# Altium PCB Environmental Shield.PcbDoc
Units mm, origin at the board's own origin, x right, y up, seen from the top; angles counter-clockwise.
Board outline 53.34 x 50.8 mm, 2 copper layers (Top Layer, Bottom Layer), stack 1.621 mm thick; 28 components, 35 nets, 119 pads, 19 vias.
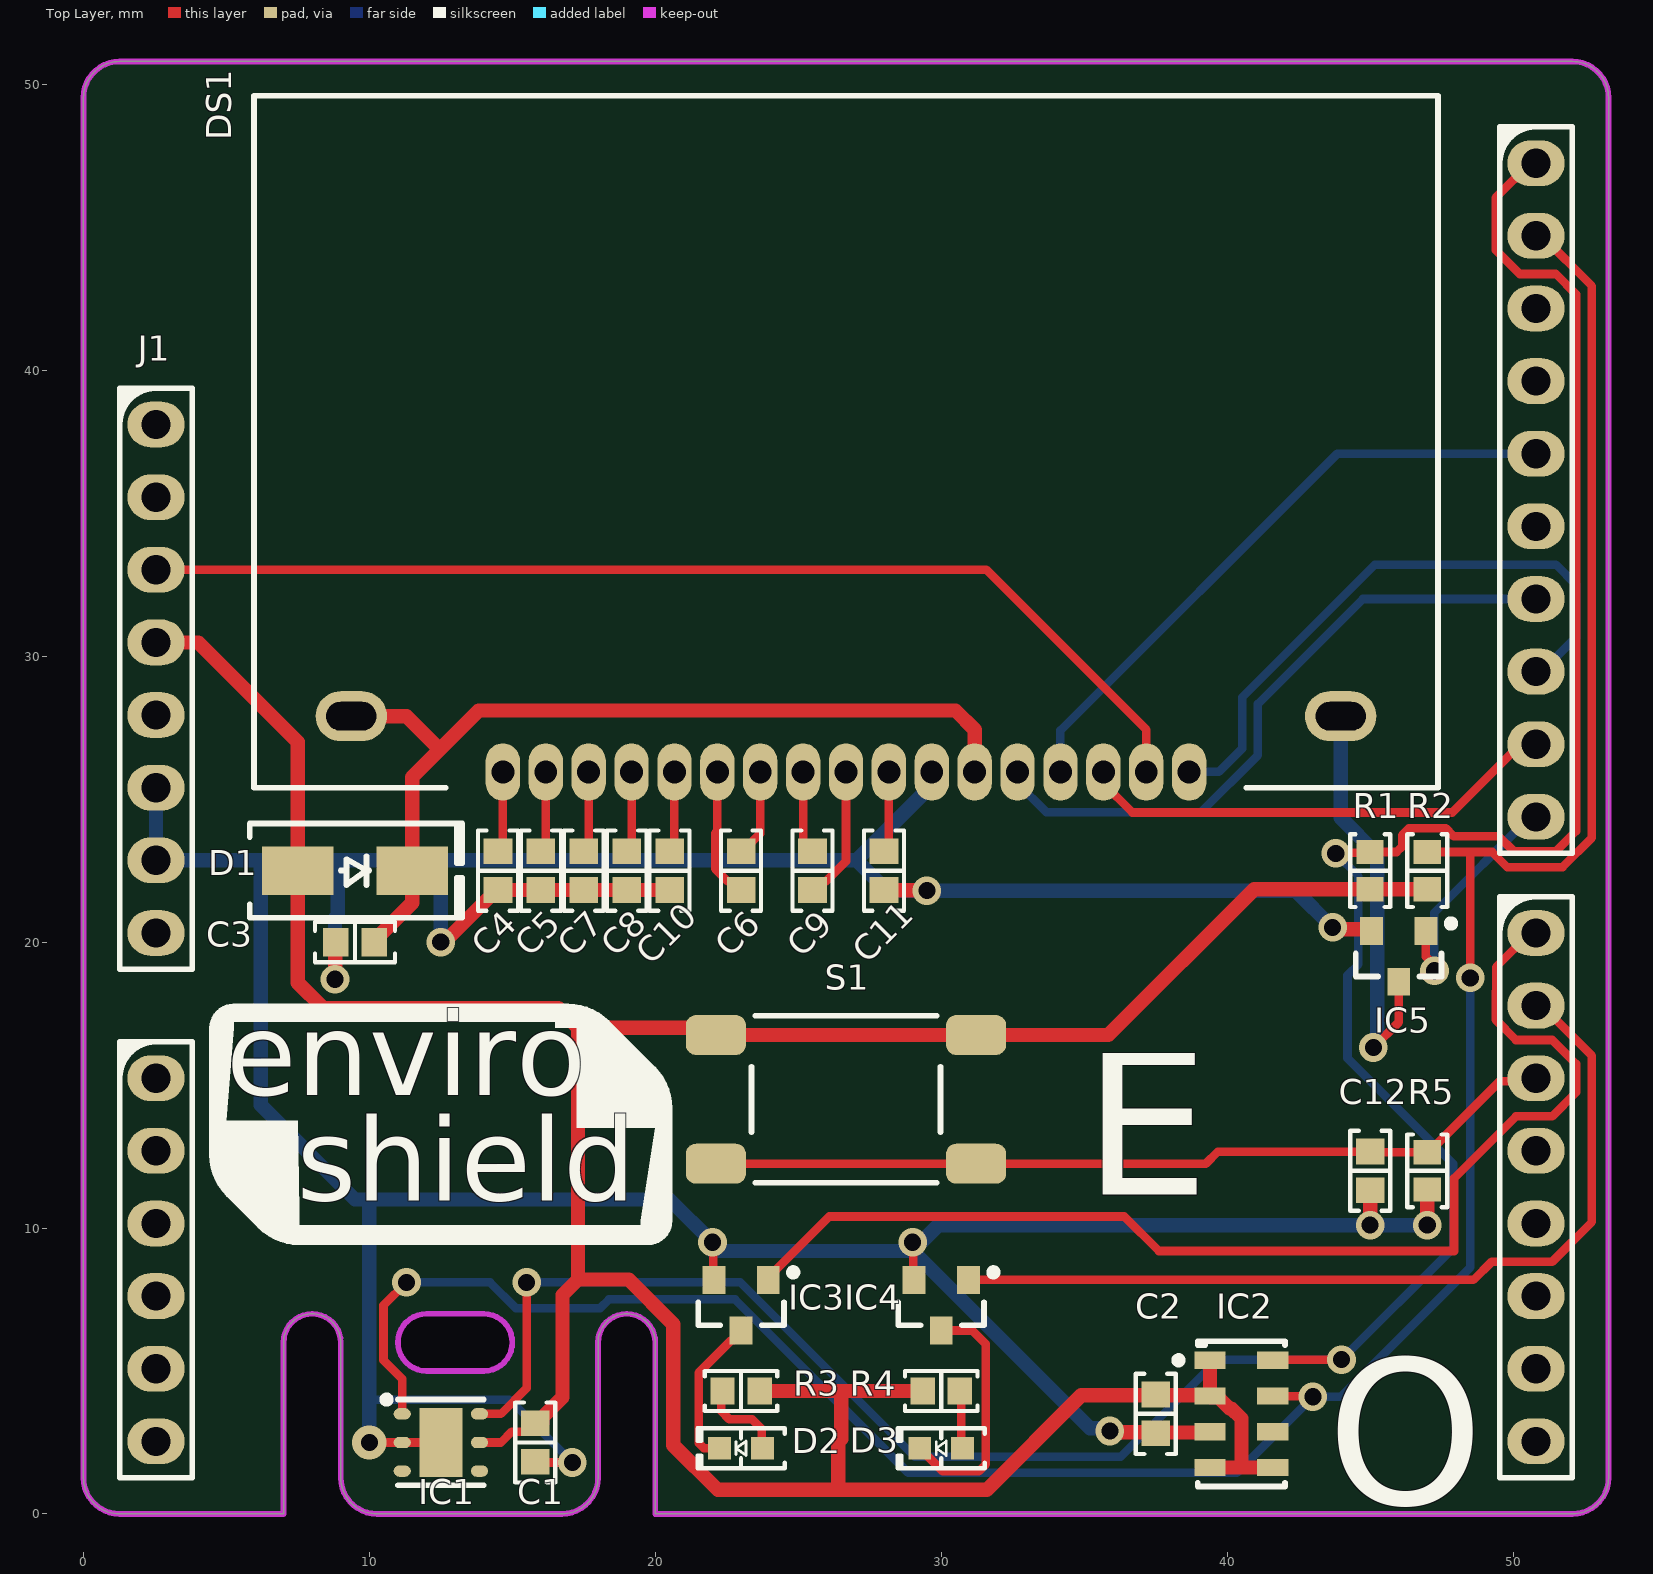
[diagram p0: Top Layer view]
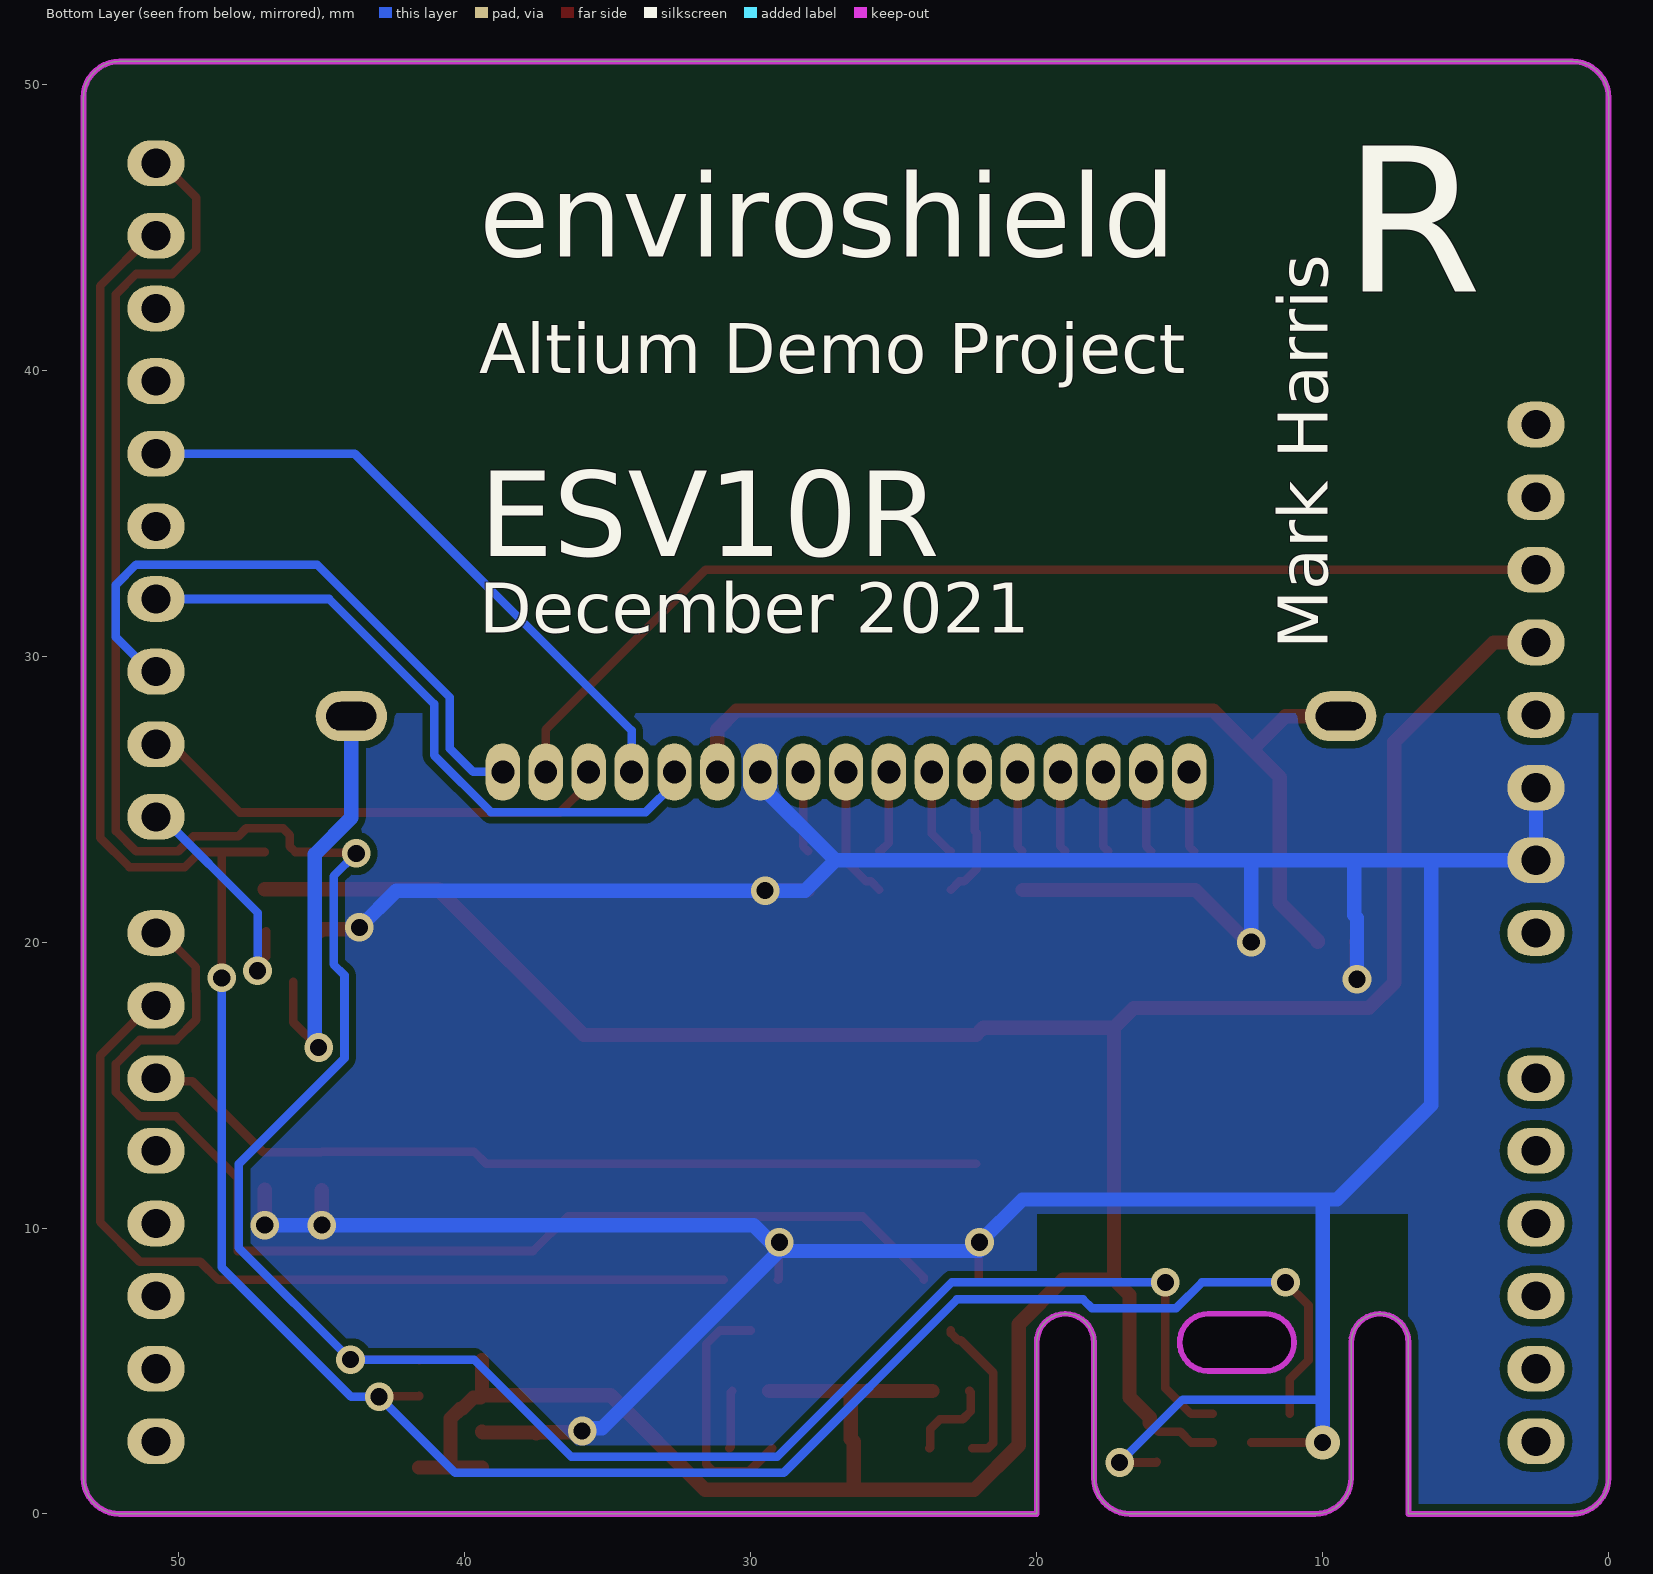
[diagram p1: Bottom Layer view, seen from below]

## Layer stack, top to bottom
Top Solder: solder mask 0.0102, Solder Resist, Dk 3.5
Top Layer: signal copper 0.0356
Dielectric 1: dielectric 1.55, FR-4, Dk 4.8
Bottom Layer: signal copper 0.0356
Bottom Solder: solder mask 0.0102, Solder Resist, Dk 3.5

## Board outline
1.27,0 7,0 7,6 cw(c8,6) 8,7 cw(c8,6) 9,6 9,1.27 ccw(c10.27,1.27) 10.27,0 16.73,0 ccw(c16.73,1.27) 18,1.27 18,6 cw(c19,6) 19,7 cw(c19,6) 20,6 20,0 52.07,0 ccw(c52.07,1.27) 53.34,1.27 53.34,49.53 ccw(c52.07,49.53) 52.07,50.8 1.27,50.8 ccw(c1.27,49.53) 0,49.53 0,1.27 ccw(c1.27,1.27)
cut-out: 11,6 cw(c12,6) 12,7 14,7 cw(c14,6) 15,6 cw(c14,6) 14,5 12,5 cw(c12,6)

## Design rules (kind name [scope] priority, off if disabled: settings)
Clearance [All] p1: gap=0.254 ignorepadtopadclearanceinfootprint=FALSE except(0: Arc-Hole Track-Hole SMDPad-Hole THPad-Hole Via-Hole Fill-Hole Poly-Hole Region-Hole Text-Hole)
MinimumSolderMaskSliver [All] p1: minsoldermaskwidth=0
PolygonConnect [All] p1: connectstyle=Direct reliefconductorwidth=0.254 reliefentries=4 polygonreliefangle="90 Angle" airgapwidth=0.254
RoutingVias [All] p1: holewidth=0.6 width=1 viastyle="Through Hole" minholewidth=0.4 minwidth=0.8 maxholewidth=3.5 maxwidth=5
SolderMaskExpansion "Via Tenting" [IsVia] p1: expansion=0.102 istentingtop=TRUE
SolderMaskExpansion [All] p2: expansion=0.102 istentingtop=FALSE
Width [All] p1: maxlimit=1 minlimit=0.2 preferedwidth=0.3
29 further rules are at their usual default settings.

## Classes and differential pairs
component class "Environmental Sensor": C1 C2 D2 D3 IC1 IC2 IC3 IC4 R1 R2 R3 R4
component class "Display Module": C3 C4 C5 C6 C7 C8 C9 C10 C11 C12 D1 DS1 IC5 R5 S1
component class Connectors: J1

## Components (designator, comment, footprint, x,y, rotation, side; value= is the part's Value field where it differs from the comment)
C1 "0.1µF" "CAP 0603_1608" 15.8,2.5 r90 top
C2 "0.1µF" "CAP 0603_1608" 37.5,3.5 r90 top
C3 "0.47µF" "CAP 0603_1608" 9.5,20 r180 top
C4 "0.47µF" "CAP 0603_1608" 14.5,22.5 r270 top
C5 "0.47µF" "CAP 0603_1608" 16,22.5 r270 top
C6 "1µF" "CAP 0603_1608" 23,22.5 r270 top
C7 "0.47µF" "CAP 0603_1608" 17.5,22.5 r270 top
C8 "0.47µF" "CAP 0603_1608" 19,22.5 r270 top
C9 "1µF" "CAP 0603_1608" 25.5,22.5 r270 top
C10 "0.47µF" "CAP 0603_1608" 20.5,22.5 r270 top
C11 "1µF" "CAP 0603_1608" 28,22.5 r90 top
C12 "0.1µF" "CAP 0603_1608" 45,12 r90 top
D1 "CDBA140L-HF" "DO214AC SMA" 9.5,22.5 r0 top
D2 "Blue" "LED 0603_1608 BLUE" 23,2.3 r180 top
D3 "Blue" "LED 0603_1608 BLUE" 30,2.3 r180 top
DS1 "NHD-C12832A1Z-FSW-FBW-3V3" "NHD-C12832A1Z WHITE" 26.67,37.5 r0 top
IC1 "HPP845E031R4" "TE HPP845E031R4" 12.5,2.5 r0 top
IC2 "MS561101BA03-50" "MEAS SPEC MS5611-01BA03" 40.5,3.5 r0 top
IC3 "BSS670S2LH6327XTSA1" "INFINEON SOT-23-3" 23,7.3 r270 top
IC4 "BSS670S2LH6327XTSA1" "INFINEON SOT-23-3" 30,7.3 r270 top
IC5 "BSS670S2LH6327XTSA1" "INFINEON SOT-23-3" 46,19.5 r270 top
J1 "920-0088-01" "SCHMARTBOARD - 920-0088-01" 26.67,24.89 r0 top locked
R1 "4.7 kOhms" "RES 0603_1608" 45,22.5 r270 top
R2 "4.7 kOhms" "RES 0603_1608" 47,22.5 r270 top
R3 "180 Ohms" "RES 0603_1608" 23,4.3 r180 top
R4 "180 Ohms" "RES 0603_1608" 30,4.3 r0 top
R5 "4.7 kOhms" "RES 0603_1608" 47,12 r90 top
S1 "FSM4JSMA" "TE FSM4JSMA" 26.67,14.5 r90 top

## Footprints (in the part's own frame and the unit in brackets; to place one, negate y for a bottom-side part, rotate by r counter-clockwise, add the part's x,y. Pads: shape width x height; smd on the part's side, far side on the other; paste and mask are expansions set on the pad)
"CAP 0603_1608" [mm] "Chip Capacitor, 2-Leads, Body 1.60x0.80mm, IPC Medium Density"
  rect 0.9x1 smd: 1(-0.675,0) 2(0.675,0)
  silkscreen extent -1.4,-0.7 1.4,0.7, body extent -0.8,-0.41 0.8,0.41, height 0.82
"DO214AC SMA" [mm] "Molded Diode, 2-Leads, Body 4.30x2.60mm, IPC Medium Density"
  rect 2.5x1.7 smd: 1(-2,0) 2(2,0)
  silkscreen extent -3.68,-1.65 3.75,1.65, body extent -2.6,-1.37 2.6,1.37, height 2.4
"INFINEON SOT-23-3" [mm] "SOT23, 3-Leads, Body 2.90x2.40mm, Pitch 0.95mm, IPC Medium Density"
  rect 0.972x0.802 smd: 1(-0.885,0.95) 2(-0.885,-0.95) 3(0.885,0)
  silkscreen extent -1.27,-1.5 0.7,1.95, body extent -1.16,-1.45 1.16,1.45, height 1
"LED 0603_1608 BLUE" [mm] "Chip Diode, 2-Leads, Body 1.60x0.80mm, IPC Medium Density"
  rect 0.8x0.8 smd: 1(-0.75,0) 2(0.75,0)
  silkscreen extent -1.52,-0.7 1.52,0.7, body extent -0.8,-0.4 0.8,0.4, height 0.53
"MEAS SPEC MS5611-01BA03" [mm] "LCC, 8-Pins, Body 3.0x5.1mm (max), Pitch 1.25mm, IPC Medium Density"
  rect 1.1x0.6 smd: 1(-1.1,1.875) 2(-1.1,0.625) 3(-1.1,-0.625) 4(-1.1,-1.875) 5(1.1,-1.875) 6(1.1,-0.625) 7(1.1,0.625) 8(1.1,1.875)
  silkscreen extent -2.32,-2.54 1.52,2.54, body extent -1.5,-2.5 1.5,2.5, height 1
"NHD-C12832A1Z WHITE" [mm]
  oval 1.2x2 hole 0.8: 1(-12,-11.55) 2(-10.5,-11.55) 3(-9,-11.55) 4(-7.5,-11.55) 5(-6,-11.55) 6(-4.5,-11.55) 7(-3,-11.55) 8(-1.5,-11.55) 9(0,-11.55) 10(1.5,-11.55) 11(3,-11.55) 12(4.5,-11.55) 13(6,-11.55) 14(7.5,-11.55) 15(9,-11.55) 16(10.5,-11.55) 17(12,-11.55)
  oval 2.5x1.75 hole 1 slot 1.75 at 0 deg: A(-17.3,-9.6) K(17.3,-9.6)
  silkscreen extent -20.7,-12.1 20.7,12.1, body extent -20.7,-12.15 20.7,12.15, height 4.9
"RES 0603_1608" [mm] "Chip Resistor, 2-Leads, Body 1.60x0.80mm, IPC Medium Density"
  rect 0.85x0.95 smd: 1(-0.65,0) 2(0.65,0)
  silkscreen extent -1.27,-0.7 1.27,0.7, body extent -0.8,-0.4 0.8,0.4, height 0.45
"SCHMARTBOARD - 920-0088-01" [mm] "Arduino pin header set"
  oval 2x1.6 hole 1.02: 1(-24.13,13.21) 2(-24.13,10.67) 3(-24.13,8.13) 4(-24.13,5.59) 5(-24.13,3.05) 6(-24.13,0.51) 7(-24.13,-2.03) 8(-24.13,-4.57) 9(-24.13,-9.65) 10(-24.13,-12.19) 11(-24.13,-14.73) 12(-24.13,-17.27) 13(-24.13,-19.81) 14(-24.13,-22.35) 15(24.13,-22.35) 16(24.13,-19.81) 17(24.13,-17.27) 18(24.13,-14.73) 19(24.13,-12.19) 20(24.13,-9.65) 21(24.13,-7.11) 22(24.13,-4.57) 23(24.13,-0.51) 24(24.13,2.03) 25(24.13,4.57) 26(24.13,7.11) 27(24.13,9.65) 28(24.13,12.19) 29(24.13,14.73) 30(24.13,17.27) 31(24.13,19.81) 32(24.13,22.35)
  silkscreen extent -25.4,-23.62 25.4,23.62, body extent -25.4,-23.62 25.4,23.62, height 8.5
"TE FSM4JSMA" [mm]
  rrect50% 1.4x2.1 smd: 1(2.25,4.55) 2(2.25,-4.55) 3(-2.25,4.55) 4(-2.25,-4.55)
  silkscreen extent -2.92,-3.3 2.92,3.3, body extent -3,-5 3,5, height 5.08
"TE HPP845E031R4" [mm] "SMT, 6-Leads, Body 3.0x3.0mm, Pitch 1.0mm, IPC Medium Density"
  oval 0.6x0.4 smd: 1(-1.35,1) 2(-1.35,0) 3(-1.35,-1) 5(1.35,0) 6(1.35,1)
  oval 0.6x0.4 smd paste+0: 4(1.35,-1)
  rect 1.5x2.4 smd: 7(0,0)
  silkscreen extent -2.02,-1.5 1.5,1.62, body extent -1.5,-1.5 1.5,1.5, height 0.9

## Part data
C1 C2 C12: library part 06035C104JAT4A, "CAP CER 0.1UF 50V X7R 0603", Device Package="0603 (1608 Metric)", Manufacturer="AVX Corporation", Operating Temperature="-55°C ~ 125°C", Supplier Part Number 1=478-12459-1-ND, Temperature Coefficient=X7R, Tolerance=±5%, Voltage - Rated=50V, Applications="General Purpose", Capacitance=0.1µF, ComponentLink1Description=Datasheet, ComponentLink1URL=http://datasheets.avx.com/X7RDielectric.pdf, ComponentLink2Description="DigiKey Link", ComponentLink2URL=http://digikey.com/product-detail/en/avx-corporation/06035C104JAT4A/478-12459-1-ND/9749311, LastUpdated="02/09/2020 01:03:34", Lifecycle Status=Active, Minimum Order=1, Mounting Type="Surface Mount, MLCC", Package / Case="0603 (1608 Metric)", Packaging=TapeAndReel, Part Number=06035C104JAT4A, Part Status=Active, PartId=3002, Price=0.01, Series=-, Size / Dimension="0.063\" L x 0.032\" W (1.60mm x 0.81mm)", Supplier 1=DigiKey, Thickness (Max)="0.035\" (0.90mm)"
C3 C4 C5 C7 C8 C10: library part 0603B474K100CT, "CAP CER 0.47UF 10V X7R 0603", Device Package="0603 (1608 Metric)", Manufacturer="Walsin Technology Corporation", Operating Temperature="-55°C ~ 125°C", Supplier Part Number 1=1292-1450-1-ND, Temperature Coefficient=X7R, Tolerance=±10%, Voltage - Rated=10V, Applications="General Purpose", Capacitance=0.47µF, ComponentLink1Description=Datasheet, ComponentLink1URL=http://www.passivecomponent.com/wp-content/uploads/2018/10/MLCC.pdf, ComponentLink2Description="DigiKey Link", ComponentLink2URL=http://digikey.com/product-detail/en/walsin-technology-corporation/0603B474K100CT/1292-1450-1-ND/9355454, LastUpdated="02/09/2020 01:03:16", Lifecycle Status=Active, Minimum Order=1, Mounting Type="Surface Mount, MLCC", Package / Case="0603 (1608 Metric)", Packaging=TapeAndReel, Part Number=0603B474K100CT, Part Status=Active, PartId=13392, Price=0.01, Series=-, Size / Dimension="0.063\" L x 0.031\" W (1.60mm x 0.80mm)", Supplier 1=DigiKey, Thickness (Max)="0.037\" (0.95mm)"
C6 C9 C11: library part LMK107B7105KA-T, "CAP CER 1UF 10V X7R 0603", Device Package="0603 (1608 Metric)", Manufacturer="Taiyo Yuden", Operating Temperature="-55°C ~ 125°C", Supplier Part Number 1=587-1242-1-ND, Temperature Coefficient=X7R, Tolerance=±10%, Voltage - Rated=10V, Applications="General Purpose", Capacitance=1µF, ComponentLink1Description=Datasheet, ComponentLink1URL=https://www.yuden.co.jp/productdata/catalog/mlcc01_e.pdf, ComponentLink2Description="DigiKey Link", ComponentLink2URL=http://digikey.com/product-detail/en/taiyo-yuden/LMK107B7105KA-T/587-1242-1-ND/931019, LastUpdated="02/09/2020 01:03:30", Lifecycle Status=Active, Minimum Order=1, Mounting Type="Surface Mount, MLCC", Package / Case="0603 (1608 Metric)", Packaging=TapeAndReel, Part Number=LMK107B7105KA-T, Part Status=Active, PartId=5525, Price=0.01, Series=M, Size / Dimension="0.063\" L x 0.031\" W (1.60mm x 0.80mm)", Supplier 1=DigiKey, Thickness (Max)="0.035\" (0.90mm)"
D1: "DIODE SCHOTTKY 40V 1A DO214AC", Capacitance @ Vr, F="130pF @ 4V, 1MHz", Current - Average Rectified (Io)=1A, Current - Reverse Leakage @ Vr="1mA @ 40V", Manufacturer="Comchip Technology", Operating Temperature - Junction="-50°C ~ 100°C", Package / Case="DO-214AC, SMA", Supplier Device Package="DO-214AC (SMA)", Supplier Part Number 1=641-1691-1-ND, Voltage - DC Reverse (Vr) (Max)=40V, Voltage - Forward (Vf) (Max) @ If="400mV @ 1A", ComponentLink1Description=Datasheet, ComponentLink1URL="http://www.comchiptech.com/admin/files/product/CDBA140L-HF RevC513944.pdf", ComponentLink2Description="DigiKey Link", ComponentLink2URL=http://digikey.com/product-detail/en/comchip-technology/CDBA140L-HF/641-1691-1-ND/5226074, Diode Type=Schottky, LastUpdated="02/09/2020 01:19:02", Lifecycle Status=Active, Minimum Order=1, Mounting Type="Surface Mount", Packaging=TapeAndReel, Part Number=CDBA140L-HF, Part Status=Active, PartId=2148, Price=0.10, Series=-, Speed="Fast Recovery =< 500ns, > 200mA (Io)", Supplier 1=DigiKey
D2 D3: library part LTST-C193TBKT-5A, "LED BLUE CLEAR CHIP SMD", Current - Test=5mA, Device Package="0603 (1608 Metric)", Lens Color=Colorless, Manufacturer="Lite-On Inc.", Millicandela Rating=15mcd, Supplier Device Package="Chip LED", Supplier Part Number 1=160-1827-1-ND, Voltage - Forward (Vf) (Typ)=2.8V, Color=Blue, ComponentLink1Description=Datasheet, ComponentLink1URL=//media.digikey.com/pdf/Data%20Sheets/Lite-On%20PDFs/LTST-C193TBKT-5A.pdf, ComponentLink2Description="DigiKey Link", ComponentLink2URL=http://digikey.com/product-detail/en/lite-on-inc/LTST-C193TBKT-5A/160-1827-1-ND/2355044, Configuration=Standard, Height (Max)=0.45mm, LastUpdated="02/09/2020 01:20:25", Lens Size="1.15mm x 0.80mm", Lens Style="Rectangle with Flat Top", Lens Transparency=Clear, Lifecycle Status=Active, Minimum Order=1, Mounting Type="Surface Mount", Package / Case="0603 (1608 Metric)", Packaging=TapeAndReel, Part Number=LTST-C193TBKT-5A, Part Status=Active, PartId=829, Price=0.06, Series=-, Size / Dimension="1.60mm L x 0.80mm W", Supplier 1=DigiKey, Viewing Angle=130°, Wavelength - Dominant=470nm, Wavelength - Peak=468nm
DS1: "LCD COG GRAPHIC 128X32", Background Color="White (Black - Inverted)", Manufacturer="Newhaven Display Intl", Supplier Part Number 1=NHD-C12832A1Z-FSW-FBW-3V3-ND, Backlight="LED - White", ComponentLink1Description=Datasheet, ComponentLink1URL=http://www.newhavendisplay.com/specs/NHD-C12832A1Z-FSW-FBW-3V3.pdf, ComponentLink2Description="DigiKey Link", ComponentLink2URL=//digikey.com/product-detail/en/newhaven-display-intl/NHD-C12832A1Z-FSW-FBW-3V3/NHD-C12832A1Z-FSW-FBW-3V3-ND/2059236, Display Mode=Transflective, Display Type="FSTN - Film Super-Twisted Nematic", Interface=SPI, LastUpdated="04/12/2019 12:49:03", Lifecycle Status=0, Minimum Order=1, Packaging=Unknown, Part Number=NHD-C12832A1Z-FSW-FBW-3V3, Part Status=Active, PartId=1, Price=11.53, Series=-, Supplier 1=DigiKey, Viewing Area="36.00mm W x 12.00mm H"
IC1: "SENSOR HUMID/TEMP 3V I2C 2% SMD", Device Package="6-VDFN Exposed Pad", Manufacturer="TE Connectivity Measurement Specialties", Operating Temperature="-40°C ~ 125°C", Supplier Device Package="6-DFN (3x3)", Supplier Part Number 1=223-1144-1-ND, Voltage - Supply="1.5V ~ 3.6V", Accuracy="±2% RH", ComponentLink1Description=Datasheet, ComponentLink1URL=https://www.te.com/commerce/DocumentDelivery/DDEController?Action=srchrtrv&DocNm=HPC199_6&DocType=Data+Sheet&DocLang=English, ComponentLink2Description="DigiKey Link", ComponentLink2URL=http://digikey.com/product-detail/en/te-connectivity-measurement-specialties/HPP845E031R4/223-1144-1-ND/3945773, Humidity Range="0 ~ 100% RH", LastUpdated="24/05/2020 22:55:13", Lifecycle Status=Active, Minimum Order=1, Mounting Type="Surface Mount", Output=12b, Output Type=I²C, Package / Case="6-VDFN Exposed Pad", Packaging=TapeAndReel, Part Number=HPP845E031R4, Part Status=Active, Price=2.87, Response Time=5s, Sensor Type="Humidity, Temperature", Series=HTU, Supplier 1=DigiKey
IC2: "BAROMETRIC PRESSURE SENSOR", Device Package=8-SMD, Manufacturer="TE Connectivity Measurement Specialties", Operating Pressure="0.15PSI ~ 17.4PSI (1kPa ~ 120kPa)", Operating Temperature="-40°C ~ 85°C", Supplier Part Number 1=223-1622-1-ND, Voltage - Supply="1.8V ~ 3.6V", Accuracy="±0.022PSI (±0.15kPa)", Applications="Board Mount", ComponentLink1Description=Datasheet, ComponentLink1URL=https://www.te.com/commerce/DocumentDelivery/DDEController?Action=srchrtrv&DocNm=MS5611-01BA03&DocType=Data+Sheet&DocLang=English, ComponentLink2Description="DigiKey Link", ComponentLink2URL=http://digikey.com/product-detail/en/te-connectivity-measurement-specialties/MS561101BA03-50/223-1622-1-ND/5277638, LastUpdated="20/04/2020 15:54:53", Lifecycle Status=Active, Maximum Pressure="87.02PSI (600kPa)", Minimum Order=1, Output="24 b", Output Type="I²C, SPI", Package / Case=8-SMD, Packaging=Unknown, Part Number=MS561101BA03-50, Part Status=Active, Port Style="No Port", Pressure Type=Absolute, Price=6.37, Series=-, Supplier 1=DigiKey, Termination Style="SMD (SMT) Tab"
IC3 IC4 IC5: "MOSFET N-CH 55V 540MA SOT23", Current - Continuous Drain (Id) @ 25°C="540mA (Ta)", Drain to Source Voltage (Vdss)=55V, Drive Voltage (Max Rds On,  Min Rds On)="4.5V, 10V", Input Capacitance (Ciss) (Max) @ Vds="75pF @ 25V", Manufacturer="Infineon Technologies", Operating Temperature="-55°C ~ 150°C (TJ)", Package / Case="TO-236-3, SC-59, SOT-23-3", Power Dissipation (Max)="360mW (Ta)", Supplier Device Package=SOT-23-3, Supplier Part Number 1=BSS670S2LH6327XTSA1CT-ND, ComponentLink1Description=Datasheet, ComponentLink1URL=https://www.infineon.com/dgdl/BSS670S2L_Rev2.5.pdf?folderId=db3a3043156fd573011622e10b5c1f67&fileId=db3a304330f68606013109e4a7fb0094, ComponentLink2Description="DigiKey Link", ComponentLink2URL=http://digikey.com/product-detail/en/infineon-technologies/BSS670S2LH6327XTSA1/BSS670S2LH6327XTSA1CT-ND/3196653, FET Type=N-Channel, Gate Charge (Qg) (Max) @ Vgs="2.26nC @ 10V", LastUpdated="02/09/2020 01:25:05", Lifecycle Status=Active, Minimum Order=1, Mounting Type="Surface Mount", Packaging=TapeAndReel, Part Number=BSS670S2LH6327XTSA1, Part Status=Active, Price=0.07, Rds On (Max) @ Id, Vgs="650mOhm @ 270mA, 10V", Series=OptiMOS™, Supplier 1=DigiKey, Technology="MOSFET (Metal Oxide)", Vgs (Max)=±20V, Vgs(th) (Max) @ Id="2V @ 2.7µA"
J1: "CONN HDR 8/10P 0.1 GOLD PCB 6PC", Insulation Color=Black, Manufacturer="Schmartboard, Inc.", Supplier Part Number 1=1988-1036-ND, ComponentLink1Description=Datasheet, ComponentLink1URL=http://schmartboard.com/content/Brochures/920-0088-01.pdf, ComponentLink2Description="DigiKey Link", ComponentLink2URL=http://digikey.com/product-detail/en/schmartboard-inc/920-0088-01/1988-1036-ND/9559319, Connector Type=Header, Contact Finish - Mating=Gold, Contact Finish - Post=Gold, Contact Length - Post="0.413\" (10.50mm)", Contact Type="Female Socket", Fastening Type=Push-Pull, Insulation Height="0.335\" (8.51mm)", LastUpdated="31/01/2020 20:49:58", Lifecycle Status=Active, Minimum Order=1, Mounting Type="Through Hole", Number of Positions="6, 8, 10", Number of Positions Loaded=All, Number of Rows=1, Packaging=Bulk, Part Number=920-0088-01, Part Status=Active, Pitch - Mating="0.100\" (2.54mm)", Price=5.00, Series=-, Style="Board to Board", Supplier 1=DigiKey, System=Connector, Termination=Solder
R1 R2 R5: library part ERJ-3EKF4701V, "RES SMD 4.7K OHM 1% 1/10W 0603", Device Package="0603 (1608 Metric)", Manufacturer="Panasonic Electronic Components", Operating Temperature="-55°C ~ 155°C", Power (Watts)="0.1W, 1/10W", Ratings=AEC-Q200, Supplier Device Package=0603, Supplier Part Number 1=P4.70KHCT-ND, Temperature Coefficient=±100ppm/°C, Tolerance=±1%, ComponentLink1Description=Datasheet, ComponentLink1URL=https://industrial.panasonic.com/cdbs/www-data/pdf/RDA0000/AOA0000C304.pdf, ComponentLink2Description="DigiKey Link", ComponentLink2URL=http://digikey.com/product-detail/en/panasonic-electronic-components/ERJ-3EKF4701V/P4.70KHCT-ND/1746782, Composition="Thick Film", Features="Automotive AEC-Q200", Height - Seated (Max)="0.022\" (0.55mm)", LastUpdated="02/09/2020 01:10:23", Lifecycle Status=Active, Minimum Order=1, Number of Terminations=2, Package / Case="0603 (1608 Metric)", Packaging=TapeAndReel, Part Number=ERJ-3EKF4701V, Part Status=Active, PartId=5645, Price=0.01, Resistance="4.7 kOhms", Series=ERJ, Size / Dimension="0.063\" L x 0.031\" W (1.60mm x 0.80mm)", Supplier 1=DigiKey
R3 R4: library part ERJ-PA3J181V, "RES SMD 180 OHM 5% 1/4W 0603", Device Package="0603 (1608 Metric)", Manufacturer="Panasonic Electronic Components", Operating Temperature="-55°C ~ 155°C", Power (Watts)="0.25W, 1/4W", Ratings=AEC-Q200, Supplier Device Package=0603, Supplier Part Number 1=P180BZCT-ND, Temperature Coefficient=±200ppm/°C, Tolerance=±5%, ComponentLink1Description=Datasheet, ComponentLink1URL=https://industrial.panasonic.com/cdbs/www-data/pdf/RDO0000/AOA0000C331.pdf, ComponentLink2Description="DigiKey Link", ComponentLink2URL=http://digikey.com/product-detail/en/panasonic-electronic-components/ERJ-PA3J181V/P180BZCT-ND/5036266, Composition="Thick Film", Features="Automotive AEC-Q200, Pulse Withstanding", Height - Seated (Max)="0.022\" (0.55mm)", LastUpdated="02/09/2020 01:09:49", Lifecycle Status=Active, Minimum Order=1, Number of Terminations=2, Package / Case="0603 (1608 Metric)", Packaging=TapeAndReel, Part Number=ERJ-PA3J181V, Part Status=Active, PartId=21551, Price=0.01, Resistance="180 Ohms", Series=ERJ, Size / Dimension="0.063\" L x 0.031\" W (1.60mm x 0.80mm)", Supplier 1=DigiKey
S1: "SWITCH TACTILE SPST-NO 0.05A 24V", Contact Rating @ Voltage="0.05A @ 24VDC", Manufacturer="TE Connectivity ALCOSWITCH Switches", Operating Force=160gf, Operating Temperature="-35°C ~ 85°C", Supplier Part Number 1=450-1129-ND, Actuator Height off PCB, Vertical=5.00mm, Actuator Orientation="Top Actuated", Actuator Type=Standard, Circuit=SPST-NO, ComponentLink1Description=Datasheet, ComponentLink1URL=https://www.te.com/commerce/DocumentDelivery/DDEController?Action=srchrtrv&DocNm=1308111-1_SWITCHES_CORE_PROGRAM_CATALOG&DocType=CS&DocLang=English, ComponentLink2Description="DigiKey Link", ComponentLink2URL=http://digikey.com/product-detail/en/te-connectivity-alcoswitch-switches/FSM4JSMA/450-1129-ND/525821, Illumination=Non-Illuminated, LastUpdated="02/09/2020 01:27:07", Lifecycle Status=Active, Minimum Order=1, Mounting Type="Surface Mount", Outline="6.00mm x 6.00mm", Packaging=Bulk, Part Number=FSM4JSMA, Part Status=Active, Price=0.23, Series=FSMJSMA, Supplier 1=DigiKey, Switch Function=Off-Mom, Termination Style="Gull Wing"

## Via types
v1: diameter 1, hole 0.6, Top Layer to Bottom Layer, tented both sides, 18 vias
v2: diameter 1.2, hole 0.6, Top Layer to Bottom Layer, tented both sides, 1 vias

## Nets (pads, with @x,y where several pads share a name; then routed paths per layer and width w, separated by ;. In a path a pad name is that pad's centre, name@x,y a point inside that pad or via, vN(x,y) a via of type N, cw(c..) or ccw(c..) an arc to the next point about the centre after c; other vN are vias at no path point)
3V0: C3.1 D1.2 DS1.12 DS1.A | length 32.3
  Top Layer w0.5: DS1.A 11.3,27.9 12.465,26.735 ; C3.1 10.175,20.05 11.5,21.375 D1.2 11.5,25.77 12.465,26.735 ; DS1.12 31.17,27.43 30.5,28.1 13.83,28.1 12.465,26.735
3V3: C1.2 C2.2 D1.1 IC1.5 IC2.1 IC2.2 IC2.4 IC2.5 J1.4 R1.2 R2.2 R3.1 R4.1 S1.1 S1.2 | length 118.8
  Top Layer w0.3: IC1.5 14.6,2.5 14.975,2.875 15.737,2.875 C1.2@16.037,3.175
  Top Layer w0.5: J1.4 4.02,30.48 7.5,27 7.5,18.58 8.384,17.696 16.604,17.696 17.3,17 ; C1.2@16.037,3.175 16.05,3.188 16.05,3.375 16.757,4.082 16.757,7.657 17.3,8.2 ; R3.1 26.5,4.3 ; R4.1 26.5,4.3 ; IC2.4 40.5,1.625 ; IC2.1 IC2.2 ; IC2.5 40.5,1.625 ; R2.2 40.944,21.85 35.844,16.75 S1.1 21.87,17 17.3,17 ; 17.3,8.2 19.068,8.2 20.632,6.637 20.632,2.405 22.195,0.842 26.4,0.842 ; 17.3,8.2 17.3,17 ; 26.4,0.842 31.588,0.842 34.896,4.15 39.375,4.15 IC2.2 ; 26.4,0.842 26.4,2.521 26.5,2.621 26.5,4.3 ; IC2.2 39.45,4.075 39.7,4.075 40.084,3.691 40.146,3.691 40.5,3.338 40.5,1.625
BARO_LED: D3.2 IC4.3 | length 8.7
  Top Layer w0.3: D3.2 30.054,1.496 31.317,1.496 31.554,1.733 31.554,5.946 31.085,6.415 IC4.3
C1+: C9.1 DS1.8 | length 2.9
  Top Layer w0.3: DS1.8 25.17,23.475 25.47,23.175 C9.1
C1-: C9.2 DS1.9 | length 4.7
  Top Layer w0.3: C9.2 25.8,22.125 25.971,22.125 26.67,22.824 DS1.9
C2+: C6.1 DS1.7 | length 3.1
  Top Layer w0.3: C6.1 23.05,23.175 23.67,23.795 DS1.7
C2-: C6.2 DS1.6 | length 4.6
  Top Layer w0.3: DS1.6 22.17,23.883 22.096,23.809 22.096,22.558 22.529,22.125 22.7,22.125 C6.2
GND: C1.1 C2.1 C3.2 C4.2 C5.2 C7.2 C8.2 C10.2 C11.1 C12.1 DS1.11 IC1.2 IC1.7 IC2.3 IC3.2 IC4.2 IC5.2 J1.6 J1.7 R5.1 | length 159.1
  Top Layer w0.3: v2(10,2.5) IC1.2 IC1.7 ; C1.1 15.825,1.8 v1(17.1,1.8) ; v1(22,9.5) 22.025,9.475 22.025,8.21 IC3.2 ; v1(29,9.5) 29.025,9.475 29.025,8.21 IC4.2
  Top Layer w0.5: v1(8.8,18.7) 8.812,18.713 8.812,19.988 C3.2 ; v1(12.5,20) 12.625,20 14.45,21.825 C4.2 C5.2 C7.2 C8.2 C10.2 ; C11.1 28.012,21.813 29.487,21.813 v1(29.5,21.8) ; v1(35.9,2.9) 35.937,2.863 37.463,2.863 C2.1 37.525,2.85 39.375,2.85 IC2.3 ; v1(43.686,20.514) 43.751,20.449 44.986,20.449 IC5.2 ; v1(45,10.1) C12.1 ; v1(47,10.1) R5.1
  Bottom Layer w0.3: 10,4 14.9,4 v1(17.1,1.8)
  Bottom Layer w0.5: J1.6 J1.7 6.2,22.86 ; v1(8.8,18.7) 8.8,20.845 8.9,20.945 8.9,22.86 ; v2(10,2.5) 10,4 10,11 ; v1(12.5,20) 12.5,22.86 ; v1@22,9.2 v1@29,9.2 ; v1(22,9.5) 20.5,11 10,11 ; DS1.11 29.67,25.489 27.041,22.86 ; v1(35.9,2.9) 35.804,2.996 35.204,2.996 v1@29,9.2 ; v1(43.686,20.514) 42.4,21.8 28.101,21.8 27.041,22.86 ; v1(47,10.1) 29.9,10.1 v1@29,9.2 ; 6.2,22.86 6.2,14.3 9.5,11 10,11 ; 6.2,22.86 8.9,22.86 ; 8.9,22.86 12.5,22.86 ; 12.5,22.86 27.041,22.86
LED-: DS1.K IC5.3 | length 14.8
  Top Layer w0.3: v1(45.113,16.313) 46,17.2 IC5.3
  Bottom Layer w0.5: DS1.K 43.97,24.35 45.244,23.076 45.244,16.579 45.113,16.449 v1(45.113,16.313)
NetD2_1: D2.1 R3.2 | length 3.1
  Top Layer w0.3: R3.2 22.3,4.25 22.3,3.6 22.588,3.313 23.388,3.313 23.726,2.974 23.726,2.324 D2.1
NetD3_1: D3.1 R4.2 | length 2
  Top Layer w0.3: R4.2 30.7,4.25 30.7,2.35 D3.1
NRST: DS1.16 J1.3 | length 38.4
  Top Layer w0.3: J1.3 31.58,33.02 37.17,27.43 DS1.16
PA5: DS1.14 J1.28 | length 22.1
  Bottom Layer w0.3: DS1.14 34.17,27.4 43.85,37.08 J1.28
PA6: J1.27
PA7: DS1.13 J1.26 | length 23.1
  Bottom Layer w0.3: DS1.13 32.67,25.55 33.674,24.546 39.086,24.546 41.076,26.536 41.076,28.326 44.75,32 J1.26
PA8: IC3.1 J1.22 | length 41.7
  Top Layer w0.3: IC3.1 23.95,8.27 26.084,10.404 36.405,10.404 37.613,9.196 47.933,9.196 47.933,11.736 50.101,13.904 51.367,13.904 52.204,14.741 52.204,15.739 51.721,16.221 51.367,16.576 50.101,16.576 49.396,17.281 49.396,18.279 49.404,18.287 49.404,19.124 50.6,20.32 J1.22
PA9: IC5.1 J1.23 | length 8.6
  Top Layer w0.3: IC5.1@47.015,20.32 IC5.1 46.95,19.489 47.25,19.189 v1(47.25,19)
  Bottom Layer w0.3: v1(47.25,19) 47.25,21.03 50.6,24.38 J1.23
PA10: J1.17
PB0: DS1.17 J1.25 | length 21.6
  Bottom Layer w0.3: DS1.17 39.706,25.95 40.522,26.765 40.522,28.555 45.171,33.204 51.499,33.204 52.204,32.499 52.204,30.664 51,29.46 J1.25
PB3: J1.18
PB4: C12.2 J1.20 R5.2 S1.3 S1.4 | length 29.9
  Top Layer w0.3: S1.3 S1.4 39.25,12.25 39.675,12.675 C12.2 45.025,12.65 R5.2 47.05,12.65 49.536,15.136 50.696,15.136 J1.20
PB5: J1.19
PB8: IC1.6 IC2.8 J1.32 R1.1 | length 97.5
  Top Layer w0.3: IC1.6 14.6,3.5 15.504,4.404 15.504,8.096 v1(15.5,8.1) ; IC2.8 41.613,5.388 43.988,5.388 v1(44,5.4) ; v1(43.8,23.1) 43.825,23.125 44.975,23.125 R1.1 45.925,23.15 46.121,23.346 46.121,23.742 46.358,23.979 47.642,23.979 47.917,23.704 49.492,23.704 50.02,23.176 51.499,23.176 52.204,23.881 52.204,42.659 51.499,43.364 50.233,43.364 49.396,44.201 49.396,46.036 50.6,47.24 J1.32
  Bottom Layer w0.3: v1(15.5,8.1) 22.976,8.1 29.08,1.996 36.274,1.996 39.678,5.4 v1(44,5.4) 47.904,9.304 47.904,12.244 44.209,15.939 44.209,18.839 44.59,19.22 44.59,22.31 v1(43.8,23.1)
PB9: IC1.1 IC2.7 J1.31 R2.1 | length 92.7
  Top Layer w0.3: IC1.1 11.15,4.723 10.496,5.377 10.496,7.296 v1(11.3,8.1) ; IC2.7 41.612,4.113 42.987,4.113 v1(43,4.1) ; R2.1 48.5,23.15 ; v1(48.5,18.75) 48.5,23.15 ; J1.31 51,44.7 52.758,42.942 52.758,23.652 51.728,22.622 49.791,22.622 49.263,23.15 48.5,23.15
  Bottom Layer w0.3: v1(11.3,8.1) 14.222,8.1 15.126,7.196 18.069,7.196 18.377,7.504 22.788,7.504 28.85,1.442 40.342,1.442 v1(43,4.1) 43.978,4.1 48.5,8.622 v1(48.5,18.75)
PB14: IC4.1 J1.21 | length 31.1
  Top Layer w0.3: IC4.1 48.614,8.185 49.253,8.824 51.367,8.824 52.758,10.215 52.758,16.022 51,17.78 J1.21
PC4: J1.16
PC5: J1.15
PC7: DS1.15 J1.24 | length 16.9
  Top Layer w0.3: DS1.15 35.67,25.55 36.687,24.533 47.872,24.533 50.259,26.92 J1.24
RTH_LED: D2.2 IC3.3 | length 5.4
  Top Layer w0.3: D2.2 21.7,2.3 21.521,2.479 21.521,4.942 22.658,6.079 22.749,6.079 23,6.33 IC3.3
V0: C4.1 DS1.1 | length 2.8
  Top Layer w0.3: C4.1 14.67,23.345 DS1.1
V1: C5.1 DS1.2 | length 2.8
  Top Layer w0.3: C5.1 16.17,23.345 DS1.2
V2: C7.1 DS1.3 | length 2.8
  Top Layer w0.3: C7.1 17.67,23.345 DS1.3
V3: C8.1 DS1.4 | length 2.8
  Top Layer w0.3: C8.1 19.17,23.345 DS1.4
V4: C10.1 DS1.5 | length 2.8
  Top Layer w0.3: C10.1 20.67,23.345 DS1.5
VOUT: C11.2 DS1.10 | length 2.8
  Top Layer w0.3: C11.2 28.17,23.345 DS1.10
pads on no net: IC1.3 IC1.4 IC2.6 J1.1 J1.2 J1.5 J1.8 J1.9 J1.10 J1.11 J1.12 J1.13 J1.14 J1.29 J1.30

## Polygon pours and split planes (outlines as drawn)
GND on Bottom Layer "GND_L02_P000" (solid, remove dead copper, pour order 0): 0,28 0,0 53.5,0 53.5,28

## Keep-outs
Keep-Out Layer:
  lines w0.2: 0,1.27 ccw(c1.27,1.27) 1.27,0 2,0 7,0 7,6 cw(c8,6) 8,7 cw(c8,6) 9,6 9,1.27 ccw(c10.27,1.27) 10.27,0 16.73,0 ccw(c16.73,1.27) 18,1.27 18,6 cw(c19,6) 19,7 cw(c19,6) 20,6 20,0 51,0 52.07,0 ccw(c52.07,1.27) 53.34,1.27 53.34,49.53 ccw(c52.07,49.53) 52.07,50.8 1.27,50.8 ccw(c1.27,49.53) 0,49.53 0,1.27 ; 11,6 cw(c12,6) 12,7 14,7 cw(c14,6) 15,6 cw(c14,6) 14,5 12,5 cw(c12,6) 11,6

## Other copper
Multi-Layer:
  pour cut-out: 20,0 20,10.5 7,10.5 7,0

## Silkscreen, mask and mechanical layers (free items; w line width, h text height)
Top Overlay:
  rectangle: 7.466,9.5 19.6,10.1
  rectangle: 5.176,17.2 16.7,17.75
  region: 19.5,9.5 19.5,10.25 20,13.5 17.25,13.5 17.25,17 16.5,17 16.5,17.75 16.698,17.75 cw(c16.698,15.21) 18.494,17.006 19.756,15.744 cw(c17.96,13.948) 20.5,13.948 20.5,10.25 cw(c19.75,10.25) 19.75,9.5
  region: 5.25,17 5,13.75 7.5,13.75 7.563,9.5 cw(c7.563,11.462) 6.175,10.075 5.075,11.175 cw(c6.462,12.563) 4.5,12.563 4.5,17 cw(c5.25,17) 5.25,17.75
  lines w0.2: 19.75,9.5 ccw(c19.75,9.5) 19.75,9.5 ; 19.75,9.5 ccw(c19.75,10.25) 20.5,10.25 20.5,14.187 ccw(c18.538,14.187) 19.925,15.575 18.325,17.175 ccw(c16.937,15.788) 16.937,17.75 5.25,17.75 ccw(c5.25,17) 4.5,17 4.5,12.563 ccw(c6.462,12.563) 5.075,11.175 6.175,10.075 ccw(c7.563,11.462) 7.563,9.5 19.75,9.5
  text "enviro" at 5,13.676 h5
  text "shield" at 7.456,10 h5
  text "E" at 34.973,9.27 h10
  text "O" at 43.488,-1.565 h10
Bottom Overlay:
  text "shield" at 27,43 h5
  text "enviro" at 39.5,43 h5
  text "R" at 9.272,40.832 h10
  text "Altium Demo Project" at 39.5,39.315 h3
  text "ESV10R" at 39.5,33.5 h3
  text "Mark Harris" at 9.25,30.25 h3 r270
  text "December 2021" at 39.5,30.25 h3
Outline:
  lines w0.2: 0,1.27 ccw(c1.27,1.27) 1.27,0 2,0 7,0 7,6 cw(c8,6) 8,7 cw(c8,6) 9,6 9,1.27 ccw(c10.27,1.27) 10.27,0 16.73,0 ccw(c16.73,1.27) 18,1.27 18,6 cw(c19,6) 19,7 cw(c19,6) 20,6 20,0 51,0 52.07,0 ccw(c52.07,1.27) 53.34,1.27 53.34,49.53 ccw(c52.07,49.53) 52.07,50.8 1.27,50.8 ccw(c1.27,49.53) 0,49.53 0,1.27 ; 11,6 ccw(c12,6) 12,5 14,5 ccw(c14,6) 15,6 ccw(c14,6) 14,7 12,7 ccw(c12,6) 11,6
Route Tool Path:
  lines w2: 8,0 8,6 ; 12,6 14,6 ; 19,0 19,6